# EAGLE board Display_v13 (EAGLE 9.7.0)
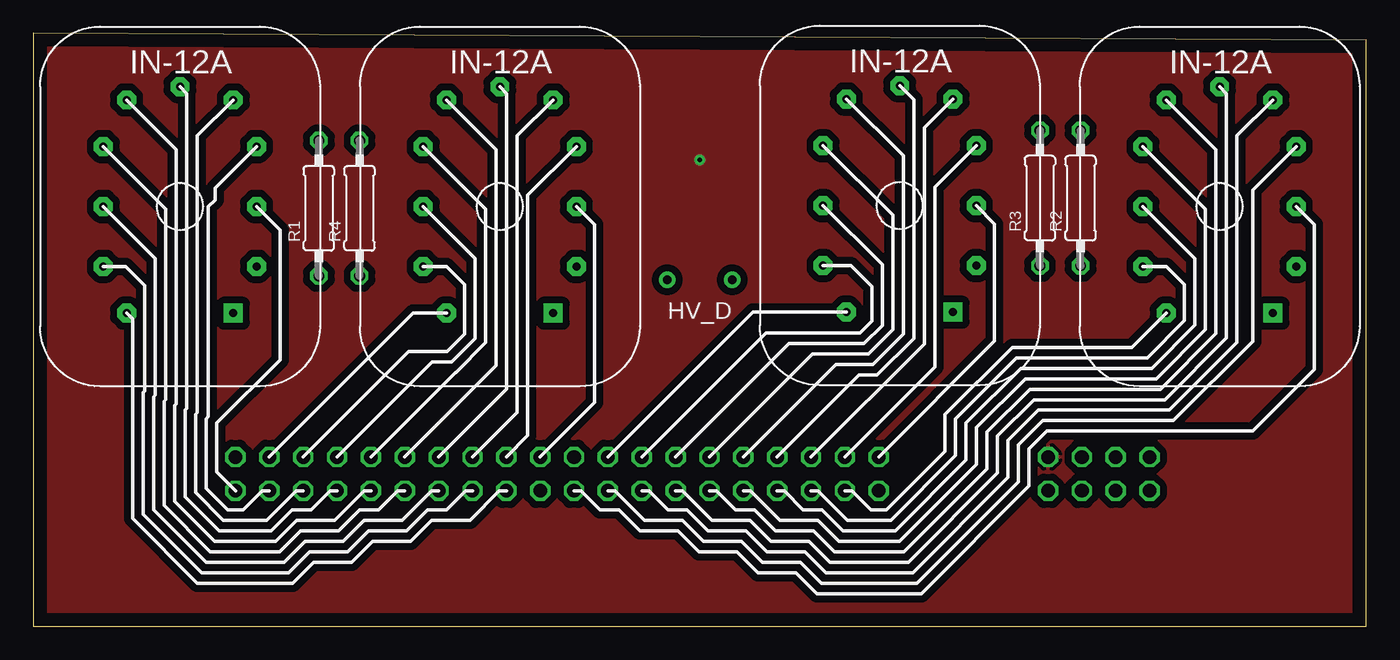
[diagram p0: board, top side]
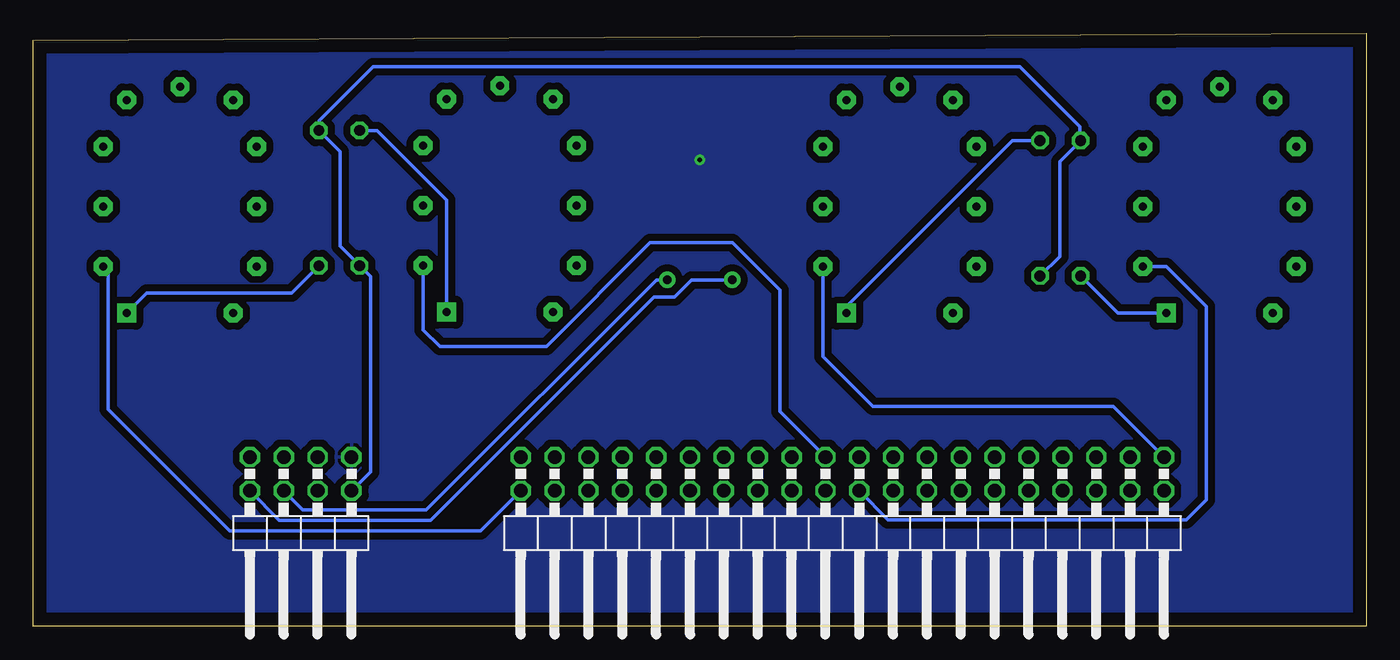
[diagram p1: board, bottom side, seen from below]

Size 100 x 44.5 mm. Coordinates in mm from the lower left corner, seen from the top.
Outline: 0,0 100,0 100,44 0,44.5 0,0
Copper layers (1*16): Top 0.035mm / dielectric 1.5mm / Bottom 0.035mm
Design rules "Fusion Electronics Design Rules": minimum track width 6mil, minimum drill 0.35mm, track to track 21mil, track to pad 21mil, pad to pad 6mil, via to via 6mil, smd to smd 6mil, copper to edge 40mil, drill to drill 6mil, minimum pad ring 10mil, minimum via ring 8mil, stop-mask expansion 4mil, vias tented up to drill 0mil, thermal gap 10mil

## Footprints (pad centres in the part's own frame; a part is rotated, then mirrored left to right if it is on the bottom)
XTALRR488W43L1135T465H1346B = drill 0.63 pad 1.23: 1 -2.44,0; 2 2.44,0
2X20/90 = drill 1.016 octagon: 1 -24.13,-6.35; 2 -24.13,-3.81; 3 -21.59,-6.35; 4 -21.59,-3.81; 5 -19.05,-6.35; 6 -19.05,-3.81; 7 -16.51,-6.35; 8 -16.51,-3.81; 9 -13.97,-6.35; 10 -13.97,-3.81; 11 -11.43,-6.35; 12 -11.43,-3.81; 13 -8.89,-6.35; 14 -8.89,-3.81; 15 -6.35,-6.35; 16 -6.35,-3.81; 17 -3.81,-6.35; 18 -3.81,-3.81; 19 -1.27,-6.35; 20 -1.27,-3.81; 21 1.27,-6.35; 22 1.27,-3.81; 23 3.81,-6.35; 24 3.81,-3.81; 25 6.35,-6.35; 26 6.35,-3.81; 27 8.89,-6.35; 28 8.89,-3.81; 29 11.43,-6.35; 30 11.43,-3.81; 31 13.97,-6.35; 32 13.97,-3.81; 33 16.51,-6.35; 34 16.51,-3.81; 35 19.05,-6.35; 36 19.05,-3.81; 37 21.59,-6.35; 38 21.59,-3.81; 39 24.13,-6.35; 40 24.13,-3.81
2X04/90 = drill 1.016 octagon: 1 -3.81,-6.35; 2 -3.81,-3.81; 3 -1.27,-6.35; 4 -1.27,-3.81; 5 1.27,-6.35; 6 1.27,-3.81; 7 3.81,-6.35; 8 3.81,-3.81
PR-D2.3XL6.5MM = drill 0.813 octagon: 1 -4.953,0; 2 5.207,0
IN-12 = drill 0.6 pad 1.422 octagon: P$1 6.5,5.5; P$2 4.75,9; P$3 4.75,13.5; P$4 4.75,18; P$5 6.5,21.5; P$6 10.5,22.5; P$7 14.5,21.5; P$8 16.25,18; P$9 16.25,13.5; P$10 16.25,9 | drill 0.6 pad 1.422 square: P$11 14.5,5.5

## Placement (x,y rotation side)
HV_D  HV_D  [XTALRR488W43L1135T465H1346B]  50,26 180 top
JP1  PINHD-2X20/90  [2X20/90]  39.3,6.35 180 bottom
JP2  PINHD-2X4/90  [2X04/90]  79.94,6.35 180 bottom
R1  2.2K  [PR-D2.3XL6.5MM]  21.42,31.24 90 top
R2  2.2K  [PR-D2.3XL6.5MM]  78.57,32 90 top
R3  2.2K  [PR-D2.3XL6.5MM]  75.53,32 90 top
R4  2.2K  [PR-D2.3XL6.5MM]  24.47,31.24 90 top
U$1  IN-12  [IN-12]  0.5,18 0 top
U$2  IN-12  [IN-12]  78.5,18 0 top
U$3  IN-12  [IN-12]  24.5,18 0 top
U$4  IN-12  [IN-12]  54.5,18.07 0 top

## Library data of the parts
HV_D = Frequency-Source; CATEGORY: Crystals; PACKAGE_SIZE: HC-49/US; PACKAGE_TYPE: THT
JP1 = Connector; CATEGORY: Headers; DESCRIPTION: Header, Right Angle, 2x20 Position; MANUFACTURER: Generic; MPN: Generic; OPERATING_TEMPERATURE: Generic; PART_STATUS: Active; PITCH: 0.100" (2.54mm); ROHS_COMPLIANCE: Generic; SERIES: Generic; SUB-CATEGORY: Headers, Male Pins; TYPE: Board to Board or Cable, Unshrouded, Through Hole, Right Angle
JP2 = Connector; CATEGORY: Headers; DESCRIPTION: Header, Right Angle, 2x4 Position; MANUFACTURER: Generic; MPN: Generic; OPERATING_TEMPERATURE: Generic; PART_STATUS: Active; PITCH: 0.100" (2.54mm); ROHS_COMPLIANCE: Generic; SERIES: Generic; SUB-CATEGORY: Headers, Male Pins; TYPE: Board to Board or Cable, Unshrouded, Through Hole, Right Angle
R1-R4 = OPL_Resistor; MPN: FHCFR-1/4W-222J
U$1-U$4 = IN-12

## Nets
AGND: JP2.1
N$2: JP1.23 U$4.P$1
N$3: JP1.39 U$4.P$9
N$5: JP1.4 U$1.P$8
N$6: JP1.6 U$1.P$7
N$11: JP1.40 U$2.P$10
N$12: JP1.22 U$2.P$9
N$21: JP1.19 U$3.P$9
N$22: JP1.17 U$3.P$8
N$23: JP1.15 U$3.P$7
N$24: JP1.13 U$3.P$6
N$25: JP1.11 U$3.P$5
N$26: JP1.9 U$3.P$4
N$27: JP1.7 U$3.P$3
N$28: JP1.5 U$3.P$2
N$29: JP1.3 U$3.P$1
N$30: JP1.1 U$3.P$10
N$41: HV_D.2 JP2.8
N$42: HV_D.1 JP2.6
N$43: JP1.14 U$1.P$3
N$44: JP1.16 U$1.P$2
N$45: R1.1 U$1.P$11
N$46: R2.1 U$2.P$11
N$47: R3.2 U$4.P$11
N$48: R4.2 U$3.P$11
N$49: JP2.2 R1.2 R2.2 R3.1 R4.1
N$50: JP1.18 U$1.P$1
N$51: JP1.20 U$1.P$10
N$52: JP1.38 U$2.P$1
N$53: JP1.36 U$2.P$2
N$54: JP1.34 U$2.P$3
N$56: JP1.24 U$2.P$8
N$57: JP1.26 U$2.P$7
N$58: JP1.28 U$2.P$6
N$59: JP1.30 U$2.P$5
N$60: JP1.32 U$2.P$4
N$61: JP1.2 U$1.P$9
N$64: JP1.8 U$1.P$6
N$65: JP1.10 U$1.P$5
N$66: JP1.12 U$1.P$4
N$77: JP1.37 U$4.P$8
N$78: JP1.35 U$4.P$7
N$79: JP1.33 U$4.P$6
N$80: JP1.31 U$4.P$5
N$81: JP1.29 U$4.P$4
N$82: JP1.27 U$4.P$3
N$83: JP1.25 U$4.P$2
N$85: JP1.21 U$4.P$10

## Tracks (layer width: path | path; a pad name or v marks a point on that pad's centre or on a via)
AGND  (via drill 0.35)
  other vias: 50,35
  pour Top: 0.08,0.08 99.92,0.08 99.92,43.92 0.08,44.42
  pour Bottom: 0.08,0.08 99.92,0.08 99.92,43.92 0.08,44.42
N$2
  Top 0.254: JP1.23 53.98,23.57 U$4.P$1
N$3
  Top 0.254: JP1.39 72.12,21.39 72.12,30.2 U$4.P$9
N$5
  Top 0.254: JP1.4 17.18,10.16 15.76,8.74 14.58,8.74 12.96,10.36 12.96,15.57 13.13,15.74 13.13,31.5 13.63,32 13.63,32.88 U$1.P$8
N$6
  Top 0.254: U$1.P$7 12.31,36.81 12.31,16.04 12.17,15.9 12.17,10.03 14.26,7.95 17.51,7.95 19.72,10.16 JP1.6
N$11
  Bottom 0.254: JP1.40 66.43,7.16 85.26,7.16 94.37,16.27 94.37,26.62 U$2.P$10
N$12
  Top 0.254: JP1.22 41.1,10.16 42.52,8.74 43.95,8.74 45.52,7.16 48.38,7.16 49.95,5.59 52.8,5.59 54.38,4.01 57.23,4.01 58.8,2.44 66.63,2.44 74.71,10.52 74.71,13.29 76.06,14.64 91.49,14.64 96.12,19.27 96.12,30.13 U$2.P$9
N$21
  Top 0.254: JP1.19 42.12,16.79 42.12,30.13 U$3.P$9
N$22
  Top 0.254: U$3.P$8 37.1,32.35 37.1,14.31 JP1.17
N$23
  Top 0.254: U$3.P$7 36.31,36.81 36.31,16.06 JP1.15
N$24
  Top 0.254: U$3.P$6 35,40.48 35.52,39.96 35.52,17.81 JP1.13
N$25
  Top 0.254: U$3.P$5 34.73,35.77 34.73,19.56 JP1.11
N$26
  Top 0.254: U$3.P$4 33.95,31.3 33.95,21.28 31.71,19.05 31.68,19.05 JP1.9
N$27
  Top 0.254: U$3.P$3 33.16,27.59 33.16,21.61 31.39,19.84 29.93,19.84 JP1.7
N$28
  Top 0.254: U$3.P$2 31,27 32.37,25.63 32.37,21.93 31.06,20.62 28.17,20.62 JP1.5
N$29
  Top 0.254: U$3.P$1 28.51,23.5 JP1.3
N$30
  Bottom 0.254: U$3.P$10 40.75,20.25 37,16.5 18.97,16.5 JP1.1
N$41
  Bottom 0.254: JP2.8 81.54,7.95 70.19,7.95 53.42,24.73 51.91,24.73 50.64,26 HV_D.2
N$42
  Bottom 0.254: JP2.6 79.79,8.74 70.52,8.74 53.26,26 HV_D.1
N$43
  Top 0.254: JP1.14 29.88,10.16 27.67,7.95 24.82,7.95 23.24,6.38 20.39,6.38 18.82,4.8 12.95,4.8 9.02,8.73 9.02,17.2 9.16,17.34 9.16,27.59 U$1.P$3
N$44
  Top 0.254: U$1.P$2 6.94,27 8.37,25.57 8.37,17.67 8.24,17.53 8.24,8.4 12.62,4.01 19.14,4.01 20.72,5.59 23.57,5.59 25.14,7.16 28,7.16 29.57,8.74 31,8.74 32.42,10.16 JP1.16
N$45
  Bottom 0.254: R1.1 18.64,23.5 U$1.P$11
N$46
  Bottom 0.254: R2.1 80.62,25 91.5,25 U$2.P$11
N$47
  Bottom 0.254: U$4.P$11 69,32 74.21,37.21 R3.2
N$48
  Bottom 0.254: R4.2 26.55,36.45 39,24 U$3.P$11
N$49
  Bottom 0.254: R4.1 23,27.76 23,34.87 R1.2 21.5,36.52 21.5,37.5 26,42 74.5,42 78.57,37.93 R2.2 77,35.64 77,28.52 R3.1 74.71,26.23 74.71,11.58 JP2.2
N$50
  Top 0.254: JP1.18 34.96,10.16 32.75,7.95 29.9,7.95 28.32,6.38 25.47,6.38 23.9,4.8 21.04,4.8 19.47,3.23 12.3,3.23 7.45,8.07 7.45,23.05 U$1.P$1
N$51
  Bottom 0.254: JP1.20 35.87,8 13.5,8 12,9.5 12,24 15,27 U$1.P$10
N$52
  Top 0.254: JP1.38 61.42,10.16 62.84,8.74 64.02,8.74 68.41,13.13 68.41,15.9 73.45,20.94 82.44,20.94 U$2.P$1
N$53
  Top 0.254: JP1.36 58.88,10.16 61.09,7.95 64.34,7.95 69.2,12.8 69.2,15.57 73.77,20.15 83.59,20.15 86.37,22.93 86.37,25.63 85,27 U$2.P$2
N$54
  Top 0.254: JP1.34 56.34,10.16 57.76,8.74 59.19,8.74 60.76,7.16 64.67,7.16 69.98,12.47 69.98,15.25 74.1,19.36 83.92,19.36 87.16,22.61 87.16,27.59 U$2.P$3
N$56
  Top 0.254: JP1.24 43.64,10.16 45.85,7.95 48.7,7.95 50.28,6.38 53.13,6.38 54.7,4.8 57.56,4.8 59.13,3.23 66.3,3.23 73.92,10.84 73.92,13.62 75.73,15.43 85.55,15.43 91.5,21.38 91.5,32.75 U$2.P$8
N$57
  Top 0.254: U$2.P$7 90.31,36.81 90.31,21.3 85.22,16.21 75.4,16.21 73.13,13.94 73.13,11.17 65.98,4.01 59.46,4.01 57.88,5.59 55.03,5.59 53.45,7.16 50.6,7.16 49.03,8.74 47.6,8.74 46.18,10.16 JP1.26
N$58
  Top 0.254: U$2.P$6 89.52,39.98 89.52,21.63 84.89,17 75.08,17 72.34,14.27 72.34,11.5 65.65,4.8 59.78,4.8 58.21,6.38 55.36,6.38 53.78,7.95 50.93,7.95 48.72,10.16 JP1.28
N$59
  Top 0.254: JP1.30 51.26,10.16 52.68,8.74 54.11,8.74 55.68,7.16 58.53,7.16 60.11,5.59 65.32,5.59 71.56,11.82 71.56,14.59 74.75,17.79 84.57,17.79 88.73,21.95 88.73,35.77 U$2.P$5
N$60
  Top 0.254: JP1.32 53.8,10.16 56.01,7.95 58.86,7.95 60.44,6.38 65,6.38 70.77,12.15 70.77,14.92 74.42,18.57 84.24,18.57 87.95,22.28 87.95,31.3 U$2.P$4
N$61
  Top 0.254: U$1.P$9 18.5,29.75 18.5,20 13.75,15.25 13.75,11.58 JP1.2
N$64
  Top 0.254: JP1.8 22.26,10.16 20.84,8.74 19.41,8.74 17.84,7.16 13.93,7.16 11.38,9.71 11.38,16.23 11.52,16.36 11.52,39.98 U$1.P$6
N$65
  Top 0.254: JP1.10 24.8,10.16 22.59,7.95 19.74,7.95 18.16,6.38 13.6,6.38 10.6,9.38 10.6,16.55 10.73,16.69 10.73,35.77 U$1.P$5
N$66
  Top 0.254: U$1.P$4 9.95,31.3 9.95,17.01 9.81,16.88 9.81,9.05 13.28,5.59 18.49,5.59 20.07,7.16 22.92,7.16 24.49,8.74 25.92,8.74 27.34,10.16 JP1.12
N$77
  Top 0.254: U$4.P$8 67.63,32.95 67.63,19.44 JP1.37
N$78
  Top 0.254: U$4.P$7 66.84,37.41 66.84,21.19 JP1.35
N$79
  Top 0.254: JP1.33 61.96,18.85 63.3,18.85 66.05,21.6 66.05,39.52 U$4.P$6
N$80
  Top 0.254: U$4.P$5 65.27,35.3 65.27,21.93 62.98,19.64 60.21,19.64 JP1.31
N$81
  Top 0.254: U$4.P$4 64.48,30.84 64.48,22.25 62.65,20.43 58.45,20.43 JP1.29
N$82
  Top 0.254: U$4.P$3 63.69,27.13 63.69,22.58 62.33,21.21 56.7,21.21 JP1.27
N$83
  Top 0.254: JP1.25 54.95,22 62,22 62.9,22.9 62.9,25.5 61.33,27.07 U$4.P$2
N$85
  Bottom 0.254: JP1.21 44,16.13 44,25.24 47.53,28.77 53.73,28.77 61.5,21 69.5,21 70.75,22.25 U$4.P$10